# Altium PCB PCB_v1.PcbDoc
Units mm, origin at the board's own origin, x right, y up, seen from the top; angles counter-clockwise.
Board outline 85 x 140 mm, 2 copper layers (Top Layer, Bottom Layer); 42 components, 46 nets, 148 pads, 317 vias.
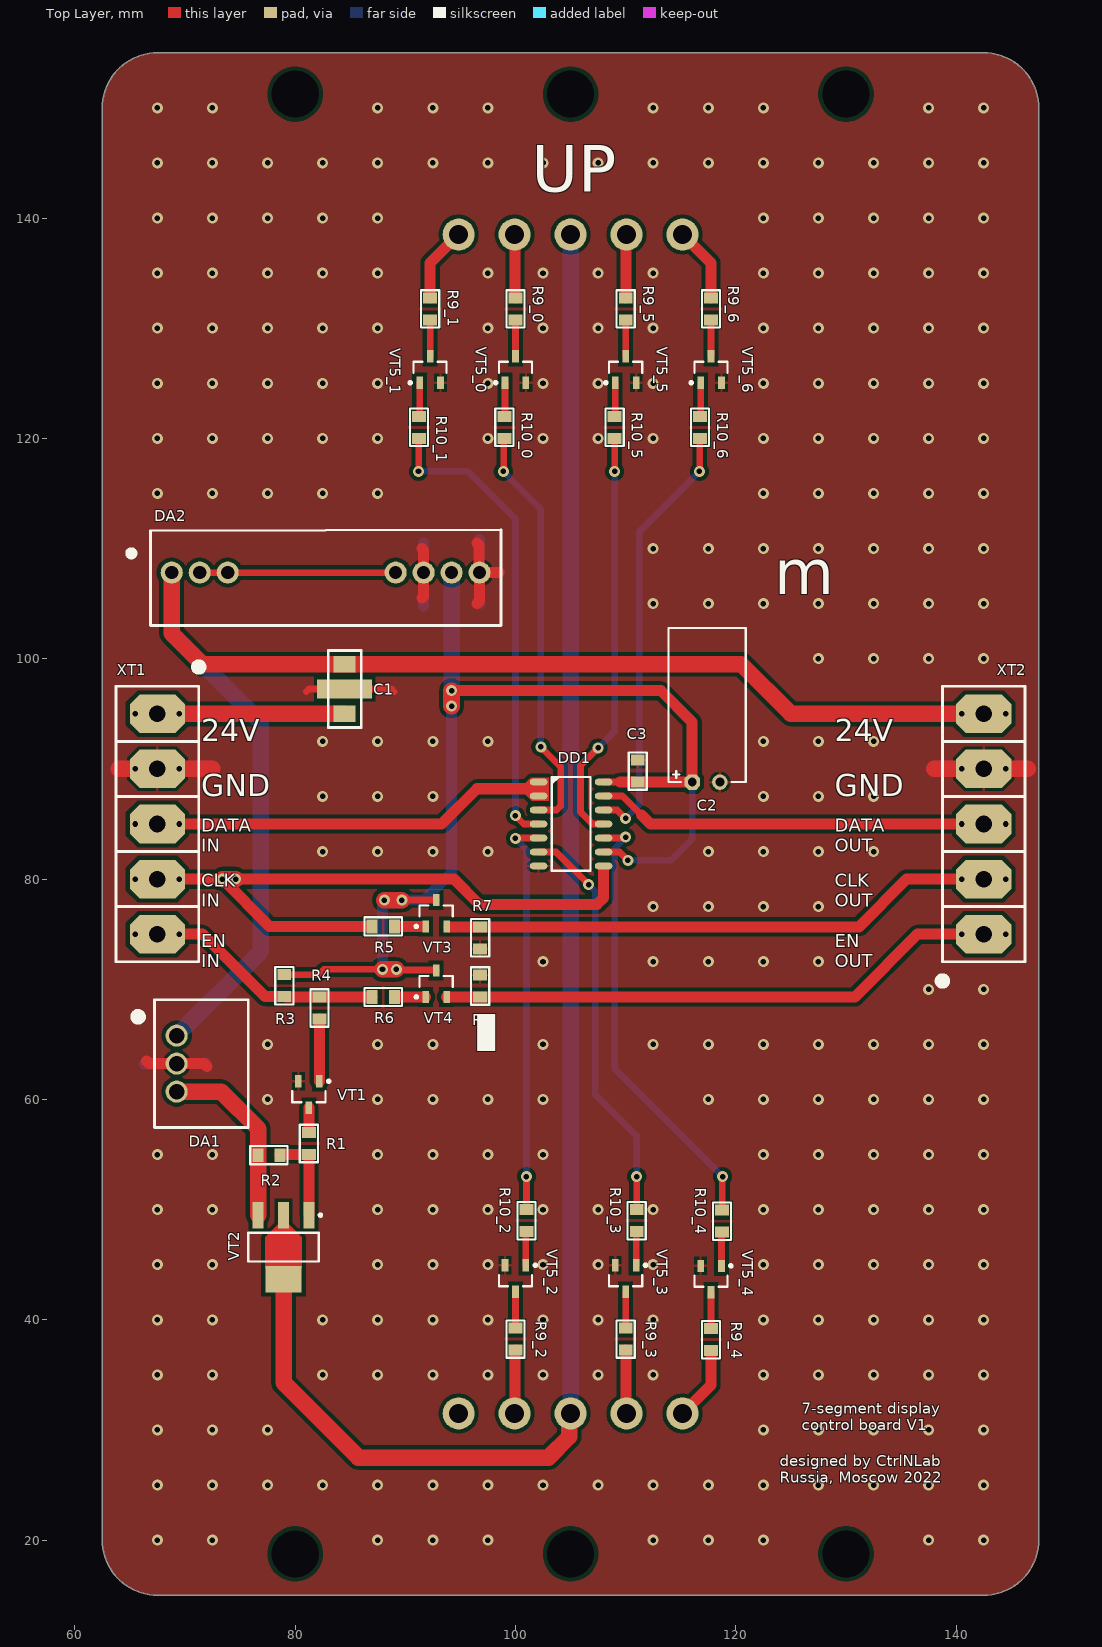
[diagram p0: Top Layer view]
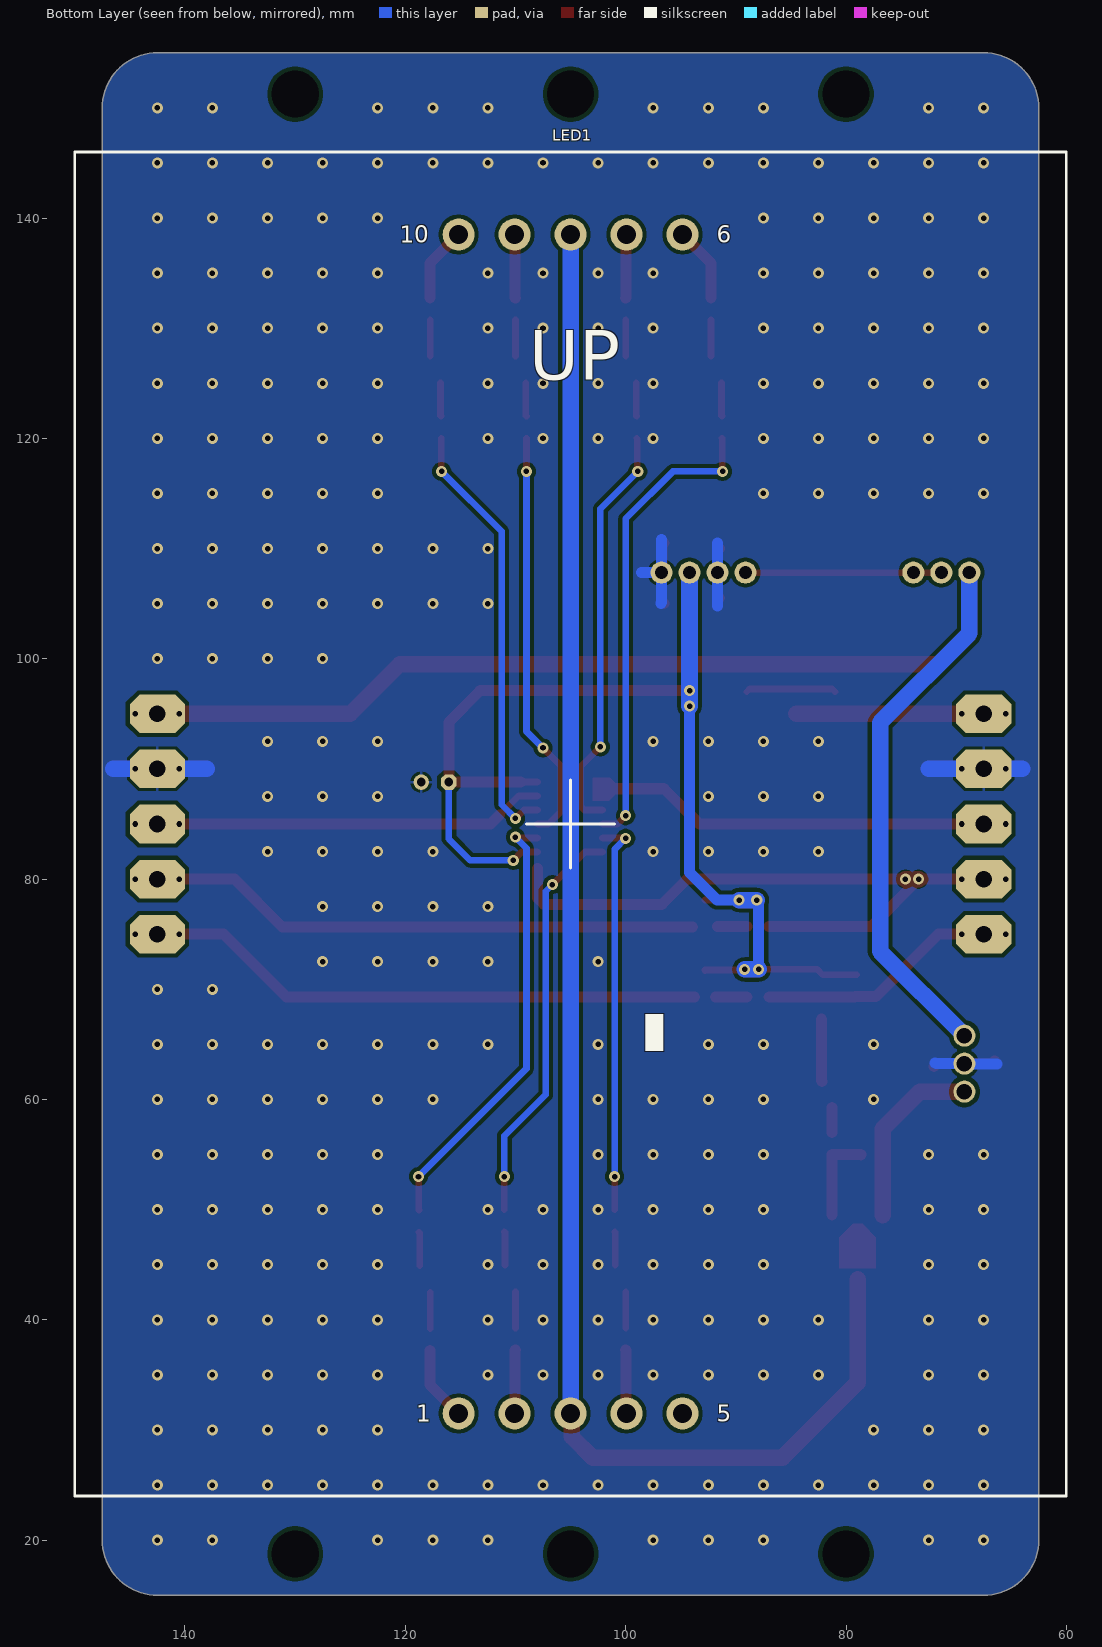
[diagram p1: Bottom Layer view, seen from below]
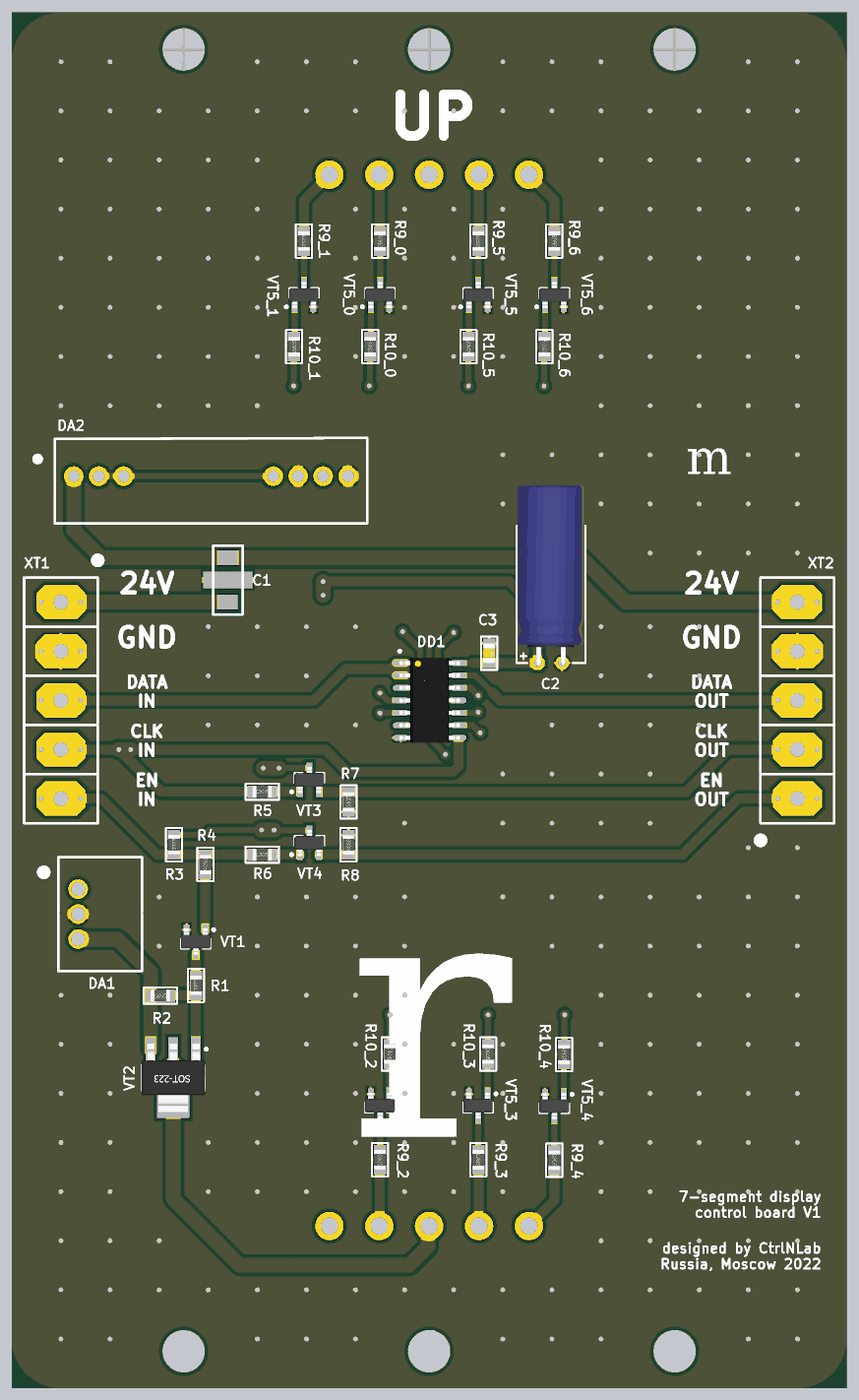
[diagram p2: 3D render of the assembled board from above, using the file's embedded part models]

## Layer stack, top to bottom
Top Solder: solder mask 0.0102, Solder Resist, Dk 3.5
Top Layer: signal copper 0.0356
Dielectric 1: dielectric 0.32, FR-4, Dk 4.8
Bottom Layer: signal copper 0.0356
Bottom Solder: solder mask 0.0102, Solder Resist, Dk 3.5

## Board outline
62.5,20 ccw(c67.5,20) 67.5,15 142.5,15 ccw(c142.5,20) 147.5,20 147.5,150 ccw(c142.5,150) 142.5,155 67.5,155 ccw(c67.5,150) 62.5,150

## Design rules (kind name [scope] priority, off if disabled: settings)
Clearance [All] p1: gap=0.35 ignorepadtopadclearanceinfootprint=FALSE except(0: Arc-Hole Track-Hole SMDPad-Hole THPad-Hole Via-Hole Fill-Hole Poly-Hole Region-Hole Text-Hole; 0.3: Arc-THPad Track-THPad)
ComponentClearance [All] p1: gap=0.01 collisioncheckmode=3 verticalgap=0.01 showdistances=FALSE donotcheckwithout3dbody=TRUE
PolygonConnect [All] p1: thpad.connectstyle=Relief thpad.reliefconductorwidth=0.254 thpad.reliefentries=4 thpad.polygonreliefangle="90 Angle" thpad.airgapwidth=0.254 smdpad.connectstyle=Relief smdpad.reliefconductorwidth=0.254 smdpad.reliefentries=4 smdpad.polygonreliefangle="90 Angle" smdpad.airgapwidth=0.254 via.connectstyle=Direct via.reliefconductorwidth=0.254 via.reliefentries=4 via.polygonreliefangle="90 Angle" via.airgapwidth=0.254
RoomDefinition 4 [InComponentClass('4')] p1: confinementstyle=ConfineIn formatcopy=TRUE lockcomponents=FALSE outline 115.5,50.95 115.5,34.95 120,34.95 120,50.95
RoomDefinition 6 [InComponentClass('6')] p2: confinementstyle=ConfineIn formatcopy=TRUE lockcomponents=FALSE outline 120,119 120,135 115.5,135 115.5,119
RoomDefinition 5 [InComponentClass('5')] p3: confinementstyle=ConfineIn formatcopy=TRUE lockcomponents=FALSE outline 112.25,119 112.25,135 107.75,135 107.75,119
RoomDefinition 3 [InComponentClass('3')] p4: confinementstyle=ConfineIn formatcopy=TRUE lockcomponents=FALSE outline 107.75,51 107.75,35 112.25,35 112.25,51
RoomDefinition 2 [InComponentClass('2')] p5: confinementstyle=ConfineIn formatcopy=TRUE lockcomponents=FALSE outline 97.75,51 97.75,35 102.25,35 102.25,51
RoomDefinition 1 [InComponentClass('1')] p6: confinementstyle=ConfineIn formatcopy=TRUE lockcomponents=FALSE outline 94.5,119 94.5,135 90,135 90,119
RoomDefinition 0 [InComponentClass('0')] p7: confinementstyle=ConfineIn formatcopy=TRUE lockcomponents=FALSE outline 102.25,119 102.25,135 97.75,135 97.75,119
RoutingVias [All] p1: holewidth=0.5 width=1 viastyle="Through Hole" minholewidth=0.5 minwidth=1 maxholewidth=0.5 maxwidth=1
SolderMaskExpansion [All] p1: expansion=0.102 istentingtop=FALSE
Width [All] p1: maxlimit=1.5 minlimit=0.6 preferedwidth=1
29 further rules are at their usual default settings.

## Classes and differential pairs
channel class Channel: 0 1 2 3 4 5 6
component class Scheme_display: C1 C2 C3 DA1 DA2 DD1 LED1 R1 R2 R3 R4 R5 R6 R7 R8 VT1 VT2 VT3 VT4 XT1 XT2
component class 6: R9_6 R10_6 VT5_6
component class 5: R9_5 R10_5 VT5_5
component class 4: R9_4 R10_4 VT5_4
component class 3: R9_3 R10_3 VT5_3
component class 2: R9_2 R10_2 VT5_2
component class 1: R9_1 R10_1 VT5_1
component class 0: R9_0 R10_0 VT5_0

## Components (designator, comment, footprint, x,y, rotation, side; value= is the part's Value field where it differs from the comment)
C1 "NFM41PC155B1E3L" NFM41PC155B1E3L 84.5,97.25 r90 top
C2 "Aluminium capacitor, 100мкФ, 35V, ±20%, 54mOhm, 14x10x5 mm, -55...+105°C" "CAP: D6.3C2.5H16" 117.3,88.8 r0 top value=100мкФ
C3 "Ceramic capacitor, 0,1мкФ, X7R, ±10%, 16V, 0805, -55...+125°C" "CAP: 0805" 111.1,89.8 r270 top value=0,1мкФ
DA1 "R-78E9.0-0.5" R-78E9.0-0.5 69.25,63.25 r270 top
DA2 "AM3F-2405SH52Z" AM3F-2405SH52Z 73.884,107.817 r0 top
DD1 "74HC164D" 14-SOIC 102.1,88.81 r0 top
LED1 "FYS-40011DUHR-2" FYS-40011DUHR-2 105,85 r180 bottom locked
R1 "Resistor film, 4К7, ±5%, 0805, 0.125W, -55...+125°C" "RES: 0805" 81.25,56 r90 top value=4К7
R2 "Resistor film, 4К7, ±5%, 0805, 0.125W, -55...+125°C" "RES: 0805" 77.624,54.943 r0 top value=4К7
R3 "Resistor film, 1K, ±5%, 0805, 0.125W, -55...+125°C" "RES: 0805" 79.018,70.325 r90 top value=1K
R4 "Resistor film, 1K, ±5%, 0805, 0.125W, -55...+125°C" "RES: 0805" 82.211,68.294 r270 top value=1K
R5 "Resistor film, 270, ±5%, 0805, 0.125W, -55...+125°C" "RES: 0805" 88,75.706 r0 top value=270
R6 "Resistor film, 270, ±5%, 0805, 0.125W, -55...+125°C" "RES: 0805" 88,69.3 r0 top value=270
R7 "Resistor film, 2K, ±5%, 0805, 0.125W, -55...+125°C" "RES: 0805" 96.791,74.665 r90 top value=2K
R8 "Resistor film, 2K, ±5%, 0805, 0.125W, -55...+125°C" "RES: 0805" 96.791,70.3 r270 top value=2K
R9_0 "Resistor film, 27, ±5%, 0805, 0.125W, -55...+125°C" "RES: 0805" 100,131.75 r90 top value=27 (schematic designator R9)
R9_1 "Resistor film, 27, ±5%, 0805, 0.125W, -55...+125°C" "RES: 0805" 92.25,131.75 r90 top value=27 (schematic designator R9)
R9_2 "Resistor film, 27, ±5%, 0805, 0.125W, -55...+125°C" "RES: 0805" 100,38.25 r270 top value=27 (schematic designator R9)
R9_3 "Resistor film, 27, ±5%, 0805, 0.125W, -55...+125°C" "RES: 0805" 110,38.25 r270 top value=27 (schematic designator R9)
R9_4 "Resistor film, 27, ±5%, 0805, 0.125W, -55...+125°C" "RES: 0805" 117.75,38.2 r270 top value=27 (schematic designator R9)
R9_5 "Resistor film, 27, ±5%, 0805, 0.125W, -55...+125°C" "RES: 0805" 110,131.75 r90 top value=27 (schematic designator R9)
R9_6 "Resistor film, 27, ±5%, 0805, 0.125W, -55...+125°C" "RES: 0805" 117.75,131.75 r90 top value=27 (schematic designator R9)
R10_0 "Resistor film, 1K, ±5%, 0805, 0.125W, -55...+125°C" "RES: 0805" 99,121 r90 top value=1K (schematic designator R10)
R10_1 "Resistor film, 1K, ±5%, 0805, 0.125W, -55...+125°C" "RES: 0805" 91.25,121 r90 top value=1K (schematic designator R10)
R10_2 "Resistor film, 1K, ±5%, 0805, 0.125W, -55...+125°C" "RES: 0805" 101,49 r270 top value=1K (schematic designator R10)
R10_3 "Resistor film, 1K, ±5%, 0805, 0.125W, -55...+125°C" "RES: 0805" 111,49 r270 top value=1K (schematic designator R10)
R10_4 "Resistor film, 1K, ±5%, 0805, 0.125W, -55...+125°C" "RES: 0805" 118.75,48.95 r270 top value=1K (schematic designator R10)
R10_5 "Resistor film, 1K, ±5%, 0805, 0.125W, -55...+125°C" "RES: 0805" 109,121 r90 top value=1K (schematic designator R10)
R10_6 "Resistor film, 1K, ±5%, 0805, 0.125W, -55...+125°C" "RES: 0805" 116.75,121 r90 top value=1K (schematic designator R10)
VT1 "NPN transistor, 45V, 100mA, 100MHz, 300mW, 0.6V, 420, SOT-23, -55...+125°C" SOT23 81.25,60.45 r270 top
VT2 "PNP transistor, 45V, 100mA, 100MHz, 300mW, 0.65V, 220, SOT-23, -55...+125°C" SOT223 78.95,46.6 r270 top
VT3 "NPN transistor, 45V, 100mA, 100MHz, 300mW, 0.6V, 420, SOT-23, -55...+125°C" SOT23 92.8,76.904 r90 top
VT4 "NPN transistor, 45V, 100mA, 100MHz, 300mW, 0.6V, 420, SOT-23, -55...+125°C" SOT23 92.8,70.5 r90 top
VT5_0 "NPN transistor, 45V, 100mA, 100MHz, 300mW, 0.6V, 420, SOT-23, -55...+125°C" SOT23 100,126.25 r90 top (schematic designator VT5)
VT5_1 "NPN transistor, 45V, 100mA, 100MHz, 300mW, 0.6V, 420, SOT-23, -55...+125°C" SOT23 92.25,126.25 r90 top (schematic designator VT5)
VT5_2 "NPN transistor, 45V, 100mA, 100MHz, 300mW, 0.6V, 420, SOT-23, -55...+125°C" SOT23 100,43.75 r270 top (schematic designator VT5)
VT5_3 "NPN transistor, 45V, 100mA, 100MHz, 300mW, 0.6V, 420, SOT-23, -55...+125°C" SOT23 110,43.75 r270 top (schematic designator VT5)
VT5_4 "NPN transistor, 45V, 100mA, 100MHz, 300mW, 0.6V, 420, SOT-23, -55...+125°C" SOT23 117.75,43.7 r270 top (schematic designator VT5)
VT5_5 "NPN transistor, 45V, 100mA, 100MHz, 300mW, 0.6V, 420, SOT-23, -55...+125°C" SOT23 110,126.25 r90 top (schematic designator VT5)
VT5_6 "NPN transistor, 45V, 100mA, 100MHz, 300mW, 0.6V, 420, SOT-23, -55...+125°C" SOT23 117.75,126.25 r90 top (schematic designator VT5)
XT1 "Connector_5_pin" CONNECTOR_5-PIN 67.5,85 r180 top locked
XT2 "Connector_5_pin" CONNECTOR_5-PIN 142.5,85 r0 top locked

## Footprints (in the part's own frame and the unit in brackets; to place one, negate y for a bottom-side part, rotate by r counter-clockwise, add the part's x,y. Pads: shape width x height; smd on the part's side, far side on the other; paste and mask are expansions set on the pad)
14-SOIC [mm] "pitch 1.27 mm"
  rrect100% 1.6x0.6 smd: 1(0,0) 2(0,-1.27) 3(0,-2.54) 4(0,-3.81) 5(0,-5.08) 6(0,-6.35) 7(0,-7.62) 8(5.9,-7.62) 9(5.9,-6.35) 10(5.9,-5.08) 11(5.9,-3.81) 12(5.9,-2.54) 13(5.9,-1.27) 14(5.9,0)
  rrect100% 0.5x0.5 on Top Overlay: ""(-0.1,1.19)
  round 0.5 on Mech1: ""(0.5,0)
  silkscreen extent 1.2,-8.05 4.7,0.45, body extent -0.12,-8.15 6.02,0.55, height 1.78
AM3F-2405SH52Z [mm] "DC-DC 5V"
  round 2 hole 1.2: 1(-5.08,0) 2(-2.54,0) 3(0,0) 9(15.24,0) 10(17.78,0) 11(20.32,0) 12(22.86,0)
  silkscreen extent -9,-4.8 24.8,3.89
"CAP: 0805" [mm]
  rect 1x1.25 smd: 1(-1,0) 2(1,0)
  silkscreen extent -1.7,-0.82 1.7,0.82, body extent -1,-0.62 1,0.63, height 0.78
"CAP: D6.3C2.5H16" [mm]
  oct 1.4x1.4 hole 0.8: 1(-1.25,0)
  round 1.4 hole 0.8: 2(1.25,0)
  silkscreen extent -3.4,0 3.6,14, body extent -3.3,-0.33 3.5,18.1, height 6.8
CONNECTOR_5-PIN [mm]
  oct 5x3.5 hole 1.5: 1(0,-10) 2(0,-5) 3(0,0) 4(0,5) 5(0,10)
  silkscreen extent -4.05,-14.55 3.75,12.5
FYS-40011DUHR-2 [mm] "Большой семисегментый индикатор"
  round 2.9 hole 1.75: 1(-10.16,-53.5) 2(-5.08,-53.5) 3(0,-53.5) 4(5.08,-53.5) 5(10.16,-53.5) 6(10.16,53.5) 7(5.08,53.5) 8(0,53.5) 9(-5.08,53.5) 10(-10.16,53.5)
  silkscreen extent -45,-61 45,61
NFM41PC155B1E3L [mm]
  rect 1.5x2 smd: 1(-2.25,0) 2(2.25,0)
  rect 1.7x5 smd: 3(0,0)
  silkscreen extent -3.5,-1.5 3.5,1.5
R-78E9.0-0.5 [mm]
  round 2 hole 1.4: 1(-2.54,0) 2(0,0) 3(2.54,0)
  silkscreen extent -5.8,-3.8 5.8,6.5
"RES: 0805" [mm]
  rect 1x1.25 smd: 1(-1,0) 2(1,0)
  silkscreen extent -1.7,-0.82 1.7,0.82, body extent -1,-0.6 1,0.6, height 0.44
SOT23 [mm]
  rect 1.1x0.6 smd: 1(-1.2,0.95) 2(-1.2,-0.95) 3(1.2,0)
  round 0.5 on Mech1: ""(-0.9,1.1)
  silkscreen extent -1.32,-1.5 0.7,1.92, body extent -1.32,-1.52 1.32,1.52, height 1.12
SOT223 [mm] "SOT223, 4-Leads, Body 6,50x7,00mm (avg), Pitch 2,30mm, IPC Medium Density"
  rect 2.4x1 smd: 1(-2.9,2.3) 2(-2.9,0) 3(-2.9,-2.3)
  rect 2.4x3.3 smd: 2(2.9,0)
  round 0.5 on Mech1: ""(-3,2.7)
  silkscreen extent -3.02,-3.2 1.3,3.48, body extent -3.48,-3.25 3.48,3.25, height 1.65

## Part data
C1: "Керамический фильтр SMD 1812"
C2: library part Aluminium, Manufacturer=Wurth, Package="14x10x5 mm", PartNumber=860080475013, Temperature=-55...+105°C, Tolerance=±20%, TypeCapacitor="Aluminium capacitor", Voltage=35V, HelpURL=https://www.digikey.com/product-detail/en/wurth-electronics-inc/860080475013/732-9029-1-ND/5728972, Impedance=54mOhm, ValueManufacturerPartNumber="Aluminium capacitor, 100мкФ, 35V, ±20%, 54mOhm, 14x10x5 mm, -55...+105°C"
C3: library part Ceramic_0805, Manufacturer=Yageo, Package=0805, PartNumber=CC0805KRX7R7BB104, Temperature=-55...+125°C, Tolerance=±10%, TypeCapacitor="Ceramic capacitor", TypeDielectric=X7R, Voltage=16V, HelpURL=https://www.digikey.com/product-detail/en/yageo/CC0805KRX7R7BB104/311-1142-1-ND/303052, ValueManufacturerPartNumber="Ceramic capacitor, 0,1мкФ, X7R, ±10%, 16V, 0805, -55...+125°C"
DA1: "DC/DC преобразователь, вход 12-28В, выход 9В/500мА"
DA2: "DC/DC преобразователь, 3Вт, вход 21.6…26.4В, выход 5В/600мА"
DD1: "Сдвиговый регистр с push-pull выходом"
LED1: "БОЛЬШОЙ 7- сегментный индикатор"
R1 R2 R3 R4 R5 R6 R7 R8 R9_0 R9_1 R9_2 R9_3 R9_4 R9_5 R9_6 R10_0 R10_1 R10_2 R10_3 R10_4 R10_5 R10_6: library part Resistor_0805, Manufacturer=Yageo, Package=0805, PartNumber=RC0805JR-07100RL, Power=0.125W, Temperature=-55...+125°C, Tolerance=±5%, TypeResistor="Resistor film", HelpURL=https://www.digikey.com/product-detail/en/yageo/RC0805JR-07100RL/311-100ARCT-ND/731185
  R1 R2: ValueManufacturerPartNumber="Resistor film, 4К7, ±5%, 0805, 0.125W, -55...+125°C"
  R3 R4 R10_0 R10_1 R10_2 R10_3 R10_4 R10_5 R10_6: ValueManufacturerPartNumber="Resistor film, 1K, ±5%, 0805, 0.125W, -55...+125°C"
  R5 R6: ValueManufacturerPartNumber="Resistor film, 270, ±5%, 0805, 0.125W, -55...+125°C"
  R7 R8: ValueManufacturerPartNumber="Resistor film, 2K, ±5%, 0805, 0.125W, -55...+125°C"
  R9_0 R9_1 R9_2 R9_3 R9_4 R9_5 R9_6: ValueManufacturerPartNumber="Resistor film, 27, ±5%, 0805, 0.125W, -55...+125°C"
VT1 VT3 VT4 VT5_0 VT5_1 VT5_2 VT5_3 VT5_4 VT5_5 VT5_6: library part BJT_NPN_132, CurrentCE=100mA, CurrentGain=420, Frequency=100MHz, Manufacturer="ON Semiconductor", MaxPower=300mW, Package=SOT-23, PartNumber=КТ229А9, Temperature=-55...+125°C, VoltageCE=45V, VoltageSaturation=0.6V, HelpURL=https://www.digikey.com/product-detail/en/on-semiconductor/BC847CLT1G/BC847CLT1GOSCT-ND/917836, TypeTransistor="NPN transistor", ValueManufacturerPartNumber="NPN transistor, 45V, 100mA, 100MHz, 300mW, 0.6V, 420, SOT-23, -55...+125°C"
VT2: library part BJT_PNP_132, CurrentCE=100mA, CurrentGain=220, Frequency=100MHz, Manufacturer="ON Semiconductor", MaxPower=300mW, Package=SOT-23, PartNumber=BDP950H6327XTSA1, Temperature=-55...+125°C, VoltageCE=45V, VoltageSaturation=0.65V, HelpURL=https://www.digikey.com/product-detail/en/on-semiconductor/BC857BLT3G/BC857BLT3GOSCT-ND/2704963, TypeTransistor="PNP transistor", ValueManufacturerPartNumber="PNP transistor, 45V, 100mA, 100MHz, 300mW, 0.65V, 220, SOT-23, -55...+125°C"

## Free pads (board coordinates)
  round 0 hole 4.3: /(80,151.25) /(80,18.75) /(105,18.75) /(105,151.25) /(130,151.25) /(130,18.75)

## Via types
v1: diameter 1, hole 0.5, Top Layer to Bottom Layer, tented both sides, 317 vias

## Nets (pads, with @x,y where several pads share a name; then routed paths per layer and width w, separated by ;. In a path a pad name is that pad's centre, name@x,y a point inside that pad or via, vN(x,y) a via of type N, cw(c..) or ccw(c..) an arc to the next point about the centre after c; other vN are vias at no path point)
+5V: C2.1 C3.2 DA2.11 DD1.9 DD1.14 R3.2 VT3.3 VT4.3 | length 113
  Top Layer w0.6: R3.2 82.125,71.325 82.6,71.8 v1(87.933,71.8) ; v1(89.2,71.8) 89.25,71.75 92.8,71.75 VT4.3 ; v1(89.7,78.1) 89.702,78.102 92.8,78.102 VT3.3 ; DD1.9 109.44,82.46 v1(110.2,81.7) ; DD1.14 108.5,88.81 109.49,88.81 109.5,88.8
  Top Layer w1: v1(94.196,97.096) 113.204,97.096 116.032,94.268 C2.1@116.032,88.81 ; 109.5,88.8 C3.2 C2.1
  Top Layer w1.5: v1(87.933,71.8) v1(89.2,71.8) ; v1(88.1,78.1) v1(89.7,78.1) ; v1(94.196,97.096) 94.196,95.704 v1(94.2,95.7)
  Bottom Layer w0.6: v1(110.2,81.7) 114.1,81.7 116.05,83.65 C2.1
  Bottom Layer w1: v1(87.933,71.8) 87.933,77.933 v1(88.1,78.1) ; v1(89.7,78.1) 91.7,78.1 94.2,80.6 v1(94.2,95.7)
  Bottom Layer w1.5: v1(87.933,71.8) v1(89.2,71.8) ; v1(88.1,78.1) v1(89.7,78.1) ; v1(94.2,95.7) 94.204,95.704 DA2.11
+9V: DA1.3 R2.1 VT2.3 | length 16.6
  Top Layer w1.5: DA1.3 73.29,60.71 76.65,57.35 VT2.3
+24V: C1.2 DA1.1 DA2.1 XT2.5 | length 130.8
  Top Layer w1.5: DA2.1 68.8,107.813 68.8,102.3 71.6,99.5 C1.2 120.5,99.5 125,95 XT2.5
  Bottom Layer w1.5: DA2.1 68.804,102.296 76.9,94.2 76.9,73.44 DA1.1
  other v1: 140.5,95 144.5,95
A_SEGMENT: DD1.3 R10_0.1 | length 37.7
  Top Layer w0.6: v1(98.9,117) 98.95,117.05 98.95,119.95 R10_0.1 ; DD1.3 103.749,86.27 104.1,86.621 104.1,90.2 v1(102.3,92)
  Bottom Layer w0.6: v1(98.9,117) 102.3,113.6 v1(102.3,92)
B_SEGMENT: DD1.4 R10_1.1 | length 43
  Top Layer w0.6: v1(91.2,117) 91.225,117.025 91.225,119.975 R10_1.1 ; v1(100,85.75) 100.75,85 DD1.4
  Bottom Layer w0.6: v1(91.2,117) 95.7,117 100,112.7 v1(100,85.75)
C_SEGMENT: DD1.5 R10_2.1 | length 36.2
  Top Layer w0.6: v1(100,83.7) 100.03,83.73 DD1.5 ; R10_2.1 v1(101,53)
  Bottom Layer w0.6: v1(100,83.7) 101,82.7 v1(101,53)
CLK_IN: DD1.8 R5.1 XT1.4 | length 59.3
  Top Layer w1: XT1.4 v1(69.5,80) 73,80 v1@73.006,79.994 ; v1(73.4,79.994) 77.694,75.7 87,75.7 R5.1 ; v1(74.606,79.994) 94.406,79.994 96.685,77.715 107.414,77.715 108,78.3 DD1.8@108,80.958
  Top Layer w1.5: v1(73.4,79.994) v1(74.606,79.994)
  other v1: 65.5,80
CLK_OUT: R7.2 VT3.2 XT2.2 | length 50.3
  Top Layer w1: VT3.2@93.95,75.665 R7.2 ; R7.2 131.165,75.665 135.5,80 XT2.2
  other v1: 140.5,80 144.5,80
D_SEGMENT: DD1.6 R10_3.1 | length 37.1
  Top Layer w0.6: DD1.6 103.69,82.46 v1(106.65,79.5) ; R10_3.1 v1(111,53)
  Bottom Layer w0.6: v1(106.65,79.5) 107.25,78.9 107.25,60.45 111,56.7 v1(111,53)
DATA_IN: DD1.1 DD1.2 XT1.3 | length 36.1
  Top Layer w1: XT1.3 93.3,85 96.5,88.2 102.3,88.2
  other v1: 65.5,85 69.5,85
DATA_OUT: DD1.13 XT2.3 | length 35.6
  Top Layer w0.6: DD1.13 109.71,87.54 111.444,85.806
  Top Layer w1: 111.444,85.806 112.25,85 XT2.3
  other v1: 140.5,85 144.5,85
E_SEGMENT: DD1.10 R10_4.1 | length 40.4
  Top Layer w0.6: DD1.10 109.93,83.73 v1(110,83.8) ; R10_4.1 118.775,49.975 118.775,52.975 v1(118.8,53)
  Bottom Layer w0.6: v1(110,83.8) 109,82.8 109,62.8 v1(118.8,53)
ENABLE_IN: R3.1 R4.1 R6.1 XT1.5 | length 21.9
  Top Layer w1: XT1.5 71.6,75 77.275,69.325 R3.1 79.143,69.325 79.168,69.3 82.211,69.3 R6.1
  other v1: 65.5,75 69.5,75
ENABLE_OUT: R8.2 VT4.2 XT2.1 | length 50.9
  Top Layer w1: VT4.2 R8.2@96.593,69.3 ; R8.2@96.831,69.3 130.8,69.3 136.5,75 XT2.1
  other v1: 140.5,75 144.5,75
F_SEGMENT: DD1.12 R10_6.1 | length 39.6
  Top Layer w0.6: DD1.12 109.23,86.27 v1(110,85.5) ; v1(116.7,117) 116.725,117.025 116.725,119.975 R10_6.1
  Bottom Layer w0.6: v1(110,85.5) 111.25,86.75 111.25,111.55 v1(116.7,117)
G_SEGMENT: DD1.11 R10_5.1 | length 37.7
  Top Layer w0.6: v1(107.5,91.9) 105.9,90.3 105.9,86.1 107,85 DD1.11 ; v1(109,117) R10_5.1
  Bottom Layer w0.6: v1(107.5,91.9) 109,93.4 v1(109,117)
GND: C1.3 C2.2 C3.1 DA1.2 DA2.10 DA2.12 DD1.7 R7.1 R8.1 VT1.2 VT5_0.2 VT5_1.2 VT5_2.2 VT5_3.2 VT5_4.2 VT5_5.2 VT5_6.2 XT1.2 XT2.4 | length 79.1
  Top Layer w0.6: 81,97 81.253,97.253 C1.3@84.497,97.253 ; C1.3 88.75,97.25 89,97
  Top Layer w1: 66.5,63.5 66.75,63.25 DA1.2 71.75,63.25 72,63 ; 91.5,105.5 91.664,105.664 DA2.10 91.664,109.836 91.5,110 ; 96.5,105 96.744,105.244 DA2.12 ; 96.5,110.5 96.683,110.317 96.683,107.879 DA2.12 ; 98.504,107.82 96.747,107.82 DA2.12
  Top Layer w1.5: 64,90 v1(65.5,90) XT1.2 v1(69.5,90) 72.5,90 ; 138,90 v1(140.5,90) XT2.4 v1(144.5,90) 146.5,90
  Bottom Layer w1: 66.3,63.225 69.225,63.225 DA1.2 71.85,63.25 71.925,63.325 ; 91.675,104.775 91.664,104.786 DA2.10 91.664,110.514 91.675,110.525 ; 96.75,110.825 96.744,110.819 DA2.12 ; 96.775,105 96.775,105.075 96.744,105.106 DA2.12 ; 98.567,107.817 DA2.12
  Bottom Layer w1.5: 64,90 v1(65.5,90) XT1.2 v1(69.5,90) 72.5,90 ; 138,90 v1(140.5,90) XT2.4 v1(144.5,90) 146.5,90
  other v1: 67.5,20 72.5,20 87.5,20 92.5,20 97.5,20 112.5,20 117.5,20 122.5,20 137.5,20 142.5,20 67.5,25 72.5,25 77.5,25 82.5,25 87.5,25 92.5,25 97.5,25 102.5,25 107.5,25 112.5,25 117.5,25 122.5,25 127.5,25 132.5,25 137.5,25 142.5,25 67.5,30 72.5,30 77.5,30 122.5,30 127.5,30 132.5,30 137.5,30 142.5,30 67.5,35 72.5,35 82.5,35 87.5,35 92.5,35 97.5,35 102.5,35 107.5,35 112.5,35 122.5,35 127.5,35 132.5,35 137.5,35 142.5,35 67.5,40 72.5,40 82.5,40 87.5,40 92.5,40 97.5,40 102.5,40 107.5,40 112.5,40 122.5,40 127.5,40 132.5,40 137.5,40 142.5,40 67.5,45 72.5,45 87.5,45 92.5,45 97.5,45 102.5,45 107.5,45 112.5,45 122.5,45 127.5,45 132.5,45 137.5,45 142.5,45 67.5,50 72.5,50 87.5,50 92.5,50 97.5,50 102.5,50 107.5,50 112.5,50 122.5,50 127.5,50 132.5,50 137.5,50 142.5,50 67.5,55 72.5,55 87.5,55 92.5,55 97.5,55 102.5,55 122.5,55 127.5,55 132.5,55 137.5,55 142.5,55 77.5,60 87.5,60 92.5,60 97.5,60 102.5,60 117.5,60 122.5,60 127.5,60 132.5,60 137.5,60 142.5,60 77.5,65 87.5,65 92.5,65 97.5,65 102.5,65 112.5,65 117.5,65 122.5,65 127.5,65 132.5,65 137.5,65 142.5,65 137.5,70 142.5,70 102.5,72.5 112.5,72.5 117.5,72.5 122.5,72.5 127.5,72.5 112.5,77.5 117.5,77.5 122.5,77.5 127.5,77.5 82.5,82.5 87.5,82.5 92.5,82.5 97.5,82.5 117.5,82.5 122.5,82.5 127.5,82.5 132.5,82.5 82.5,87.5 87.5,87.5 92.5,87.5 122.5,87.5 127.5,87.5 132.5,87.5 82.5,92.5 87.5,92.5 92.5,92.5 97.5,92.5 122.5,92.5 127.5,92.5 132.5,92.5 127.5,100 132.5,100 137.5,100 142.5,100 112.5,105 117.5,105 122.5,105 127.5,105 132.5,105 137.5,105 142.5,105 112.5,110 117.5,110 122.5,110 127.5,110 132.5,110 137.5,110 142.5,110 67.5,115 72.5,115 77.5,115 82.5,115 87.5,115 122.5,115 127.5,115 132.5,115 137.5,115 142.5,115 67.5,120 72.5,120 77.5,120 82.5,120 87.5,120 97.5,120 102.5,120 107.5,120 112.5,120 122.5,120 127.5,120 132.5,120 137.5,120 142.5,120 67.5,125 72.5,125 77.5,125 82.5,125 87.5,125 97.5,125 102.5,125 107.5,125 112.5,125 122.5,125 127.5,125 132.5,125 137.5,125 142.5,125 67.5,130 72.5,130 77.5,130 82.5,130 87.5,130 97.5,130 102.5,130 107.5,130 112.5,130 122.5,130 127.5,130 132.5,130 137.5,130 142.5,130 67.5,135 72.5,135 77.5,135 82.5,135 87.5,135 97.5,135 102.5,135 107.5,135 112.5,135 122.5,135 127.5,135 132.5,135 137.5,135 142.5,135 67.5,140 72.5,140 77.5,140 82.5,140 87.5,140 122.5,140 127.5,140 132.5,140 137.5,140 142.5,140 67.5,145 72.5,145 77.5,145 82.5,145 87.5,145 92.5,145 97.5,145 102.5,145 107.5,145 112.5,145 117.5,145 122.5,145 127.5,145 132.5,145 137.5,145 142.5,145 67.5,150 72.5,150 87.5,150 92.5,150 97.5,150 112.5,150 117.5,150 122.5,150 137.5,150 142.5,150
NetC1_1: C1.1 XT1.1 | length 17
  Top Layer w1.5: XT1.1 C1.1
  other v1: 65.5,95 69.5,95
NetDA2_2: DA2.2 DA2.3 DA2.9 | length 17.8
  Top Layer w0.6: DA2.2 DA2.3 DA2.9
NetLED1_1: LED1.1 R9_4.2 | length 6.8
  Top Layer w1: LED1.1 117.75,34.09 R9_4.2
NetLED1_2: LED1.2 R9_3.2 | length 5.8
  Top Layer w1: R9_3.2 110.04,37.25 110.04,31.54 LED1.2
NetLED1_3: LED1.3 LED1.8 VT2.2 | length 148.1
  Top Layer w1.5: VT2.2@78.95,43.7 78.95,34.3 85.75,27.5 103,27.5 104.884,29.384 104.884,31.384 LED1.3
  Bottom Layer w1.5: LED1.3 LED1.8
NetLED1_4: LED1.4 R9_2.2 | length 5.8
  Top Layer w1: LED1.4 99.96,31.54 99.96,37.25 R9_2.2
NetLED1_6: LED1.6 R9_1.2 | length 6.8
  Top Layer w1: R9_1.2 92.25,135.91 LED1.6
NetLED1_7: LED1.7 R9_0.2 | length 5.8
  Top Layer w1: LED1.7 99.96,138.46 99.96,132.75 R9_0.2
NetLED1_9: LED1.9 R9_5.2 | length 5.8
  Top Layer w1: R9_5.2 110.04,132.75 110.04,138.46 LED1.9
NetLED1_10: LED1.10 R9_6.2 | length 6.8
  Top Layer w1: LED1.10 117.75,135.91 R9_6.2
NetR1_1: R1.1 R2.2 VT2.1 | length 8.2
  Top Layer w1: R2.2 78.624,55 R1.1 VT2.1
NetR1_2: R1.2 VT1.3 | length 2.3
  Top Layer w1: R1.2 VT1.3
NetR4_2: R4.2 VT1.1 | length 5.7
  Top Layer w1: VT1.1 82.205,61.655 82.205,67.294 R4.2
NetR5_2: R5.2 VT3.1 | length 2.6
  Top Layer w1: R5.2@89,75.719 VT3.1@91.65,75.719
NetR6_2: R6.2 VT4.1 | length 2.9
  Top Layer w1: R6.2 VT4.1
NetR9_0_1: R9_0.1 VT5_0.3 | length 3.3
  Top Layer w0.6: VT5_0.3 R9_0.1
NetR9_1_1: R9_1.1 VT5_1.3 | length 3.3
  Top Layer w0.6: VT5_1.3 R9_1.1
NetR9_2_1: R9_2.1 VT5_2.3 | length 3.3
  Top Layer w0.6: R9_2.1 VT5_2.3
NetR9_3_1: R9_3.1 VT5_3.3 | length 3.3
  Top Layer w0.6: R9_3.1 VT5_3.3
NetR9_4_1: R9_4.1 VT5_4.3 | length 3.3
  Top Layer w0.6: R9_4.1 VT5_4.3
NetR9_5_1: R9_5.1 VT5_5.3 | length 3.3
  Top Layer w0.6: VT5_5.3 R9_5.1
NetR9_6_1: R9_6.1 VT5_6.3 | length 3.3
  Top Layer w0.6: VT5_6.3 R9_6.1
NetR10_0_2: R10_0.2 VT5_0.1 | length 3.1
  Top Layer w0.6: R10_0.2 99.05,122.05 VT5_0.1
NetR10_1_2: R10_1.2 VT5_1.1 | length 3.1
  Top Layer w0.6: R10_1.2 91.3,122.05 VT5_1.1
NetR10_2_2: R10_2.2 VT5_2.1 | length 3.1
  Top Layer w0.6: VT5_2.1 100.95,47.95 R10_2.2
NetR10_3_2: R10_3.2 VT5_3.1 | length 3.1
  Top Layer w0.6: VT5_3.1 110.95,47.95 R10_3.2
NetR10_4_2: R10_4.2 VT5_4.1 | length 3.1
  Top Layer w0.6: VT5_4.1 118.7,47.9 R10_4.2
NetR10_5_2: R10_5.2 VT5_5.1 | length 3.1
  Top Layer w0.6: R10_5.2 109.05,122.05 VT5_5.1
NetR10_6_2: R10_6.2 VT5_6.1 | length 3.1
  Top Layer w0.6: R10_6.2 116.8,122.05 VT5_6.1
pads on no net: DD1. LED1.5 VT1. VT2. VT3. VT4. VT5_0. VT5_1. VT5_2. VT5_3. VT5_4. VT5_5. VT5_6.

## Polygon pours and split planes (outlines as drawn)
GND on Bottom Layer "GND_L02_P000" (solid, pour order 0): 62.5,20 ccw(c67.5,20) 67.5,15 142.5,15 ccw(c142.5,20) 147.5,20 147.5,150 ccw(c142.5,150) 142.5,155 67.5,155 ccw(c67.5,150) 62.5,150
GND on Top Layer "GND_L01_P001" (solid, pour order 1): 62.5,20 ccw(c67.5,20) 67.5,15 142.5,15 ccw(c142.5,20) 147.5,20 147.5,150 ccw(c142.5,150) 142.5,155 67.5,155 ccw(c67.5,150) 62.5,150

## Other copper
Top Layer:
  region net DATA_IN: 103,89.2 103,87.1 101.5,87.1 100.9,87.7 100.9,88.7 101.4,89.2
  region net NetLED1_3: 77.3,44.7 77.3,47.5 78.5,48.7 79.4,48.7 80.6,47.5 80.6,44.7

## Silkscreen, mask and mechanical layers (free items; w line width, h text height)
Top Overlay:
  text "UP" at 101.501,142.401 h4.2
  text "m" at 123.5,104.504 h7
  text "24V" at 71.5,92.5 h2
  text "24V" at 129,92.5 h2
  text "GND" at 71.5,87.5 h2
  text "GND" at 129,87.5 h2
  text "DATA  / IN" at 71.5,82.5 h1.2
  text "DATA  / OUT" at 129,82.5 h1.2
  text "CLK / IN" at 71.5,77.5 h1.2
  text "CLK / OUT" at 129,77.5 h1.2
  text "EN / IN" at 71.5,72 h1.2
  text "EN / OUT" at 129,72 h1.2
  text "r" at 94.885,54.869 h50
  text "7-segment display / control board V1" at 126,29.986 h1
  text "designed by CtrlNLab / Russia, Moscow 2022" at 124,25.231 h1
Bottom Overlay:
  text "r" at 94.885,54.869 h50
Bottom Paste:
  lines w0.254: 50,151.25 100,151.25 100,147.5 ; 62.5,147.5 147.5,147.5 ; 62.5,155 147.5,155 ; 80,147.5 80,155 ; 99.4,151.25 149.4,151.25 ; 105,147.5 105,155 ; 130,147.5 130,155
Board outline:
  the board outline again, w0.254
Drill Drawing:
  lines w0.254: 62.5,15 147.5,155 ; 62.5,155 147.5,15 ; 67.5,87.5 67.5,85 62.5,85 105,85 ; 69.3,116.989 119.3,117 ; 90,28.5 90,119 ; 90,35 117.75,35 ; 90.7,53 140.7,53.011 ; 96.96,35 97,31.5 ; 97.75,28.25 97.75,119 ; 102.9,35 102.997,53 ; 105,15 105,85 ; 105,155 105,85 ; 107.003,117 107.1,135 ; 107.75,28.25 107.75,119 ; 115.5,28.25 115.5,119 ; 142.5,85 142.5,87.5 ; 147.5,85 105,85

## Text inside footprints (layer, text, board x,y; h text height)
LED1: Bottom Overlay "UP" at 108.749,125.3 h4.5; Bottom Overlay "5" at 91.746,30.754 h1.52; Bottom Overlay "1" at 118.996,30.754 h1.52; Bottom Overlay "6" at 91.746,137.754 h1.52; Bottom Overlay "10" at 120.496,137.754 h1.52